# Altium PCB DE-020224.PcbDoc (part 3 of 3)
Units mil, origin at the board's own origin, x right, y up, seen from the top; angles counter-clockwise.
Board outline 7874.02 x 3937.01 mil, 2 copper layers (Top Layer, Bottom Layer); 364 components, 290 nets, 895 pads, 45 vias.
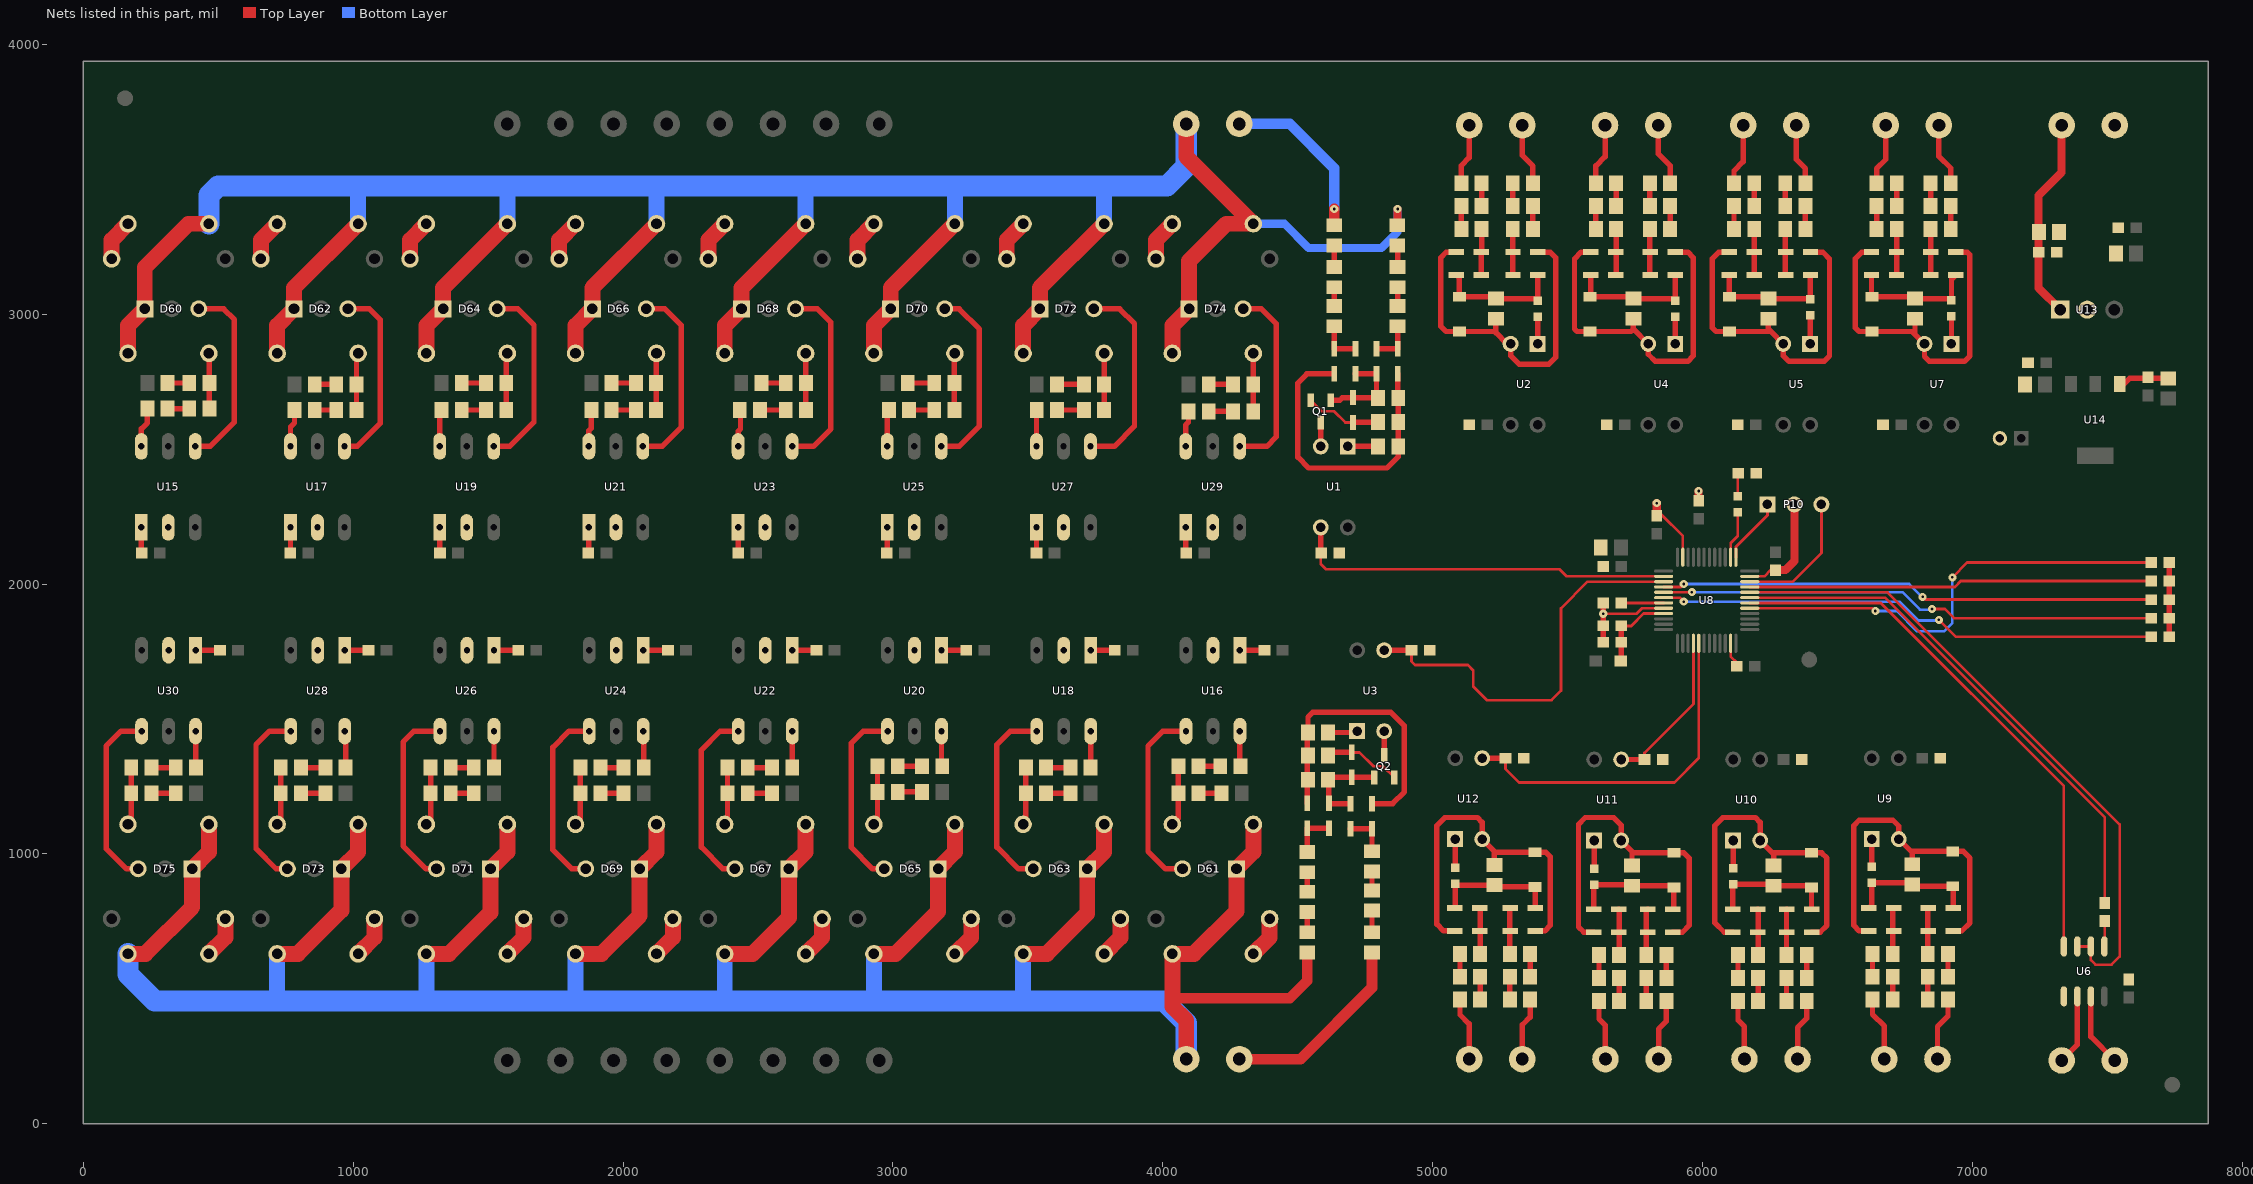
[diagram p2: the nets of this part, all layers, seen from the top]

## Via types
v1: diameter 30, hole 10, Top Layer to Bottom Layer, 45 vias

## Nets (pads, with @x,y where several pads share a name; then routed paths per layer and width w, separated by ;. In a path a pad name is that pad's centre, name@x,y a point inside that pad or via, vN(x,y) a via of type N, cw(c..) or ccw(c..) an arc to the next point about the centre after c; other vN are vias at no path point) (continued)
DIN6: R65.1 U8.16 U11.3 | length 592.1
  Top Layer w10: R65.1@5784.69,1350 5784.69,1374.69 5965.79,1555.79 U8.16@5965.79,1780.55
  Top Layer w20: U11.3@5698.15,1350 R65.1@5784.69,1350
DIN7: R79.1 U8.17 U12.3 | length 1325.4
  Top Layer w10: R79.1@5269.69,1355 5269.69,1315.31 5320,1265 5895,1265 5985.47,1355.47 U8.17@5985.47,1780.55
  Top Layer w20: U12.3@5183.15,1355 R79.1@5269.69,1355
L1: C29.2 C30.1 C32.2 C33.2 C34.2 C35.1 C37.2 C38.2 C39.2 C40.1 C42.2 C44.1 C49.1 C54.1 C57.1 C59.1 D60.1 D62.1 D64.1 D66.1 D68.1 D70.1 D72.1 D74.1 P14.1 R4.1 | length 10933.9
  Top Layer w30: R4.1@4868.46,3329.8 4870,3331.34 v1(4870,3390)
  Top Layer w59.06: C30.1@165.53,2855 165.53,2957.7 D60.1@227.83,3020 227.83,3172.83 390,3335 C29.2@465.53,3335 ; C35.1@718.31,2855 718.31,2957.7 D62.1@780.62,3020 780.62,3097.3 C32.2@1018.31,3335 ; C40.1@1271.09,2855 1271.09,2957.7 D64.1@1333.4,3020 1333.4,3097.3 C33.2@1571.09,3335 ; C44.1@1823.88,2855 1823.88,2957.7 D66.1@1886.18,3020 1886.18,3097.3 C34.2@2123.88,3335 ; C49.1@2376.66,2855 2376.66,2957.7 D68.1@2438.96,3020 2438.96,3097.3 C37.2@2676.66,3335 ; C54.1@2929.44,2855 2929.44,2957.7 D70.1@2991.74,3020 2991.74,3097.3 C38.2@3229.44,3335 ; C57.1@3482.22,2855 3482.22,2957.7 D72.1@3544.52,3020 3544.52,3097.3 C39.2@3782.22,3335 ; C59.1@4035,2855 4035,2957.7 D74.1@4097.3,3020 4097.3,3197.3 4235,3335 C42.2@4335,3335 4086.57,3583.43 P14.1@4086.57,3705
  Bottom Layer w30: C42.2@4335,3335 4450,3335 4540,3245 4810,3245 4870,3305 v1(4870,3390)
  Bottom Layer w59.06: C32.2@1018.31,3335 1018.31,3463.31 1030,3475 ; C33.2@1571.09,3335 1571.09,3471.09 1575,3475 ; 2120,3475 2123.88,3471.12 C34.2@2123.88,3335 ; 2670,3475 2676.66,3468.34 C37.2@2676.66,3335 ; C38.2@3229.44,3335 3229.44,3474.44 3230,3475 ; C39.2@3782.22,3335 3782.22,3472.22 3785,3475
  Bottom Layer w78.74: C29.2@465.53,3335 465.53,3440.53 500,3475 1030,3475 1575,3475 2120,3475 2670,3475 3230,3475 3785,3475 4015,3475 4086.57,3546.57 P14.1@4086.57,3705
L2: C31.1 C36.1 C41.1 C43.2 C45.1 C46.2 C47.2 C48.2 C50.1 C51.2 C52.2 C53.2 C55.1 C56.2 C58.1 C60.1 D61.1 D63.1 D65.1 D67.1 D69.1 D71.1 D73.1 D75.1 P15.1 R20.1 | length 11536.9
  Top Layer w39.37: 4035,465 4470,465 4535,530 R20.1@4535,635
  Top Layer w59.06: C56.2@165.53,630 230,630 403.23,803.23 D75.1@403.23,945 465.53,1007.3 C60.1@465.53,1110 ; C53.2@718.31,630 795,630 956.01,791.01 D73.1@956.01,945 1018.31,1007.3 C58.1@1018.31,1110 ; C52.2@1271.09,630 1355,630 1508.79,783.79 D71.1@1508.79,945 1571.09,1007.3 C55.1@1571.09,1110 ; C51.2@1823.88,630 1920,630 2061.57,771.57 D69.1@2061.57,945 2123.88,1007.3 C50.1@2123.88,1110 ; C48.2@2376.66,630 2480,630 2614.35,764.35 D67.1@2614.35,945 2676.66,1007.3 C45.1@2676.66,1110 ; C47.2@2929.44,630 3010,630 3167.13,787.13 D65.1@3167.13,945 3229.44,1007.3 C41.1@3229.44,1110 ; C46.2@3482.22,630 3570,630 3719.92,779.92 D63.1@3719.92,945 3782.22,1007.3 C36.1@3782.22,1110 ; P15.1@4086.57,240 4086.57,383.43 4035,435 4035,465 C43.2@4035,630 4115,630 4272.7,787.7 D61.1@4272.7,945 4335,1007.3 C31.1@4335,1110
  Bottom Layer w59.06: C53.2@718.31,630 718.31,456.69 720,455 ; 1270,455 1271.09,456.09 C52.2@1271.09,630 ; 1820,455 1823.88,458.88 C51.2@1823.88,630 ; 2370,455 2376.66,461.66 C48.2@2376.66,630 ; 2925,455 2929.44,459.44 C47.2@2929.44,630 ; 3475,455 3482.22,462.22 C46.2@3482.22,630
  Bottom Layer w78.74: C56.2@165.53,630 165.53,554.47 265,455 720,455 1270,455 1820,455 2370,455 2925,455 3475,455 4005,455 4086.57,373.43 P15.1@4086.57,240
N1: P14.2 R12.1 | length 630.1
  Top Layer w39.37: R12.1@4635,3329.8 v1(4635,3390)
  Bottom Layer w39.37: P14.2@4283.43,3705 4470,3705 4635,3540 v1(4635,3390)
N2: P15.2 R29.1 | length 731.5
  Top Layer w39.37: P15.2@4283.43,240 4510,240 4775,505 R29.1@4775,635.2
NetC1_1: C1.1 D6.2 Q1.2 | length 284.7
  Top Layer w10: Q1.2@4547.6,2681.34 4588.94,2640 4635,2640 4676.26,2598.74 D6.2@4705,2598.74
  Top Layer w20: D6.2@4705,2598.74 4706.26,2600 C1.1@4797.6,2600
NetC1_2: C1.2 D1.1 D3.1 R1.2 R9.1 | length 1137.8
  Top Layer w20: D3.1@4635,2778.74 4533.74,2778.74 4500,2745 4500,2470 4540,2430 4830,2430 4872.4,2472.4 R1.2@4872.4,2510 R9.1@4872.4,2690 4870,2692.4 D1.1@4870,2778.74
NetC2_1: C2.1 D8.2 D9.2 D11.2 U2.2 | length 1334.2
  Top Layer w20: D11.2@5087.17,3229.98 5049.98,3229.98 5030,3210 5030,2955 5049.37,2935.63 D8.2@5098.43,2935.63 5229.37,2935.63 5233.53,2931.47 ; C2.1@5233.53,2982.81 5233.53,2931.47 ; D9.2@5389.69,3229.98 5435.02,3229.98 5455,3210 5455,2840 5430,2815 5320,2815 5288.43,2846.57 U2.2@5288.43,2890 5275,2890 5233.53,2931.47
NetC2_2: C2.2 D2.1 D4.1 D5.1 D8.1 | length 477.4
  Top Layer w20: D5.1@5087.17,3145 5098.43,3133.74 D8.1@5098.43,3064.37 5226.77,3064.37 C2.2@5233.53,3057.61 5380.34,3057.61 D2.1@5388.43,3049.53 5389.69,3050.79 D4.1@5389.69,3145
NetC3_1: C3.1 D19.2 Q2.2 | length 288
  Top Layer w10: D19.2@4700,1376.26 4728.74,1376.26 4780,1325 4816.06,1325 Q2.2@4857.4,1283.66
  Top Layer w20: C3.1@4612.4,1365 4623.66,1376.26 D19.2@4700,1376.26
NetC3_2: C3.2 D13.1 D15.1 R17.2 R25.1 | length 1089.6
  Top Layer w20: D13.1@4535,1187.52 4535,1447.4 R17.2@4537.6,1450 4537.6,1507.6 4555,1525 4845,1525 4895,1475 4895,1230 4851.26,1186.26 D15.1@4775,1186.26
NetC4_1: C4.1 D17.2 D18.2 D21.2 U4.2 | length 1337.2
  Top Layer w20: D21.2@5585.59,3230 5550,3230 5525,3205 5525,2945 5534.37,2935.63 D17.2@5583.43,2935.63 5734.06,2935.63 5743.43,2945 ; C4.1@5743.43,2982.81 5743.43,2945 ; D18.2@5898.11,3229.98 5945.02,3229.98 5965,3210 5965,2845 5945,2825 5825,2825 5798.43,2851.57 U4.2@5798.43,2890 5743.43,2945
NetC4_2: C4.2 D12.1 D14.1 D16.1 D17.1 | length 498.3
  Top Layer w20: D16.1@5585.59,3145 5585.59,3066.54 D17.1@5583.43,3064.37 5736.67,3064.37 C4.2@5743.43,3057.61 5890.34,3057.61 D12.1@5898.43,3049.53 5898.43,3144.69 D14.1@5898.11,3145
NetC6_1: C6.1 D26.2 D27.2 D28.2 U5.2 | length 1341.3
  Top Layer w20: D28.2@6098.74,3230 6060,3230 6035,3205 6035,2950 6049.37,2935.63 D26.2@6100,2935.63 6252.8,2935.63 ; C6.1@6243.43,2982.81 6243.43,2945 6252.8,2935.63 ; D27.2@6399.69,3230 6445,3230 6470,3205 6470,2845 6450,2825 6320,2825 6298.43,2846.57 U5.2@6298.43,2890 6252.8,2935.63
NetC6_2: C6.2 D23.1 D24.1 D25.1 D26.1 | length 474.6
  Top Layer w20: D25.1@6098.74,3145 6098.74,3065.63 D26.1@6100,3064.37 6236.67,3064.37 C6.2@6243.43,3057.61 6395.34,3057.61 D23.1@6398.43,3054.53 6398.43,3143.74 D24.1@6399.69,3145
NetC7_1: C7.1 D32.2 D33.2 D34.2 U7.2 | length 1327.3
  Top Layer w20: D34.2@6625.59,3230 6590,3230 6565,3205 6565,2950 6579.37,2935.63 D32.2@6626.85,2935.63 6776.22,2935.63 6786.85,2925 ; C7.1@6786.85,2982.81 6786.85,2925 ; D33.2@6938.11,3230 6980,3230 6990,3220 6990,2845 6970,2825 6840,2825 6821.85,2843.15 U7.2@6821.85,2890 6786.85,2925
NetC7_2: C7.2 D29.1 D30.1 D31.1 D32.1 | length 481.3
  Top Layer w20: D31.1@6625.59,3145 6625.59,3065.63 D32.1@6626.85,3064.37 6780.09,3064.37 C7.2@6786.85,3057.61 6916.01,3057.61 D29.1@6921.85,3051.77 6921.85,3128.74 D30.1@6938.11,3145
NetC8_1: C8.1 D38.2 D39.2 D40.2 U9.2 | length 1319.3
  Top Layer w20: D39.2@6615.31,715 6580,715 6560,735 6560,1105 6580,1125 6705,1125 6726.57,1103.43 U9.2@6726.57,1055 6776.57,1005 ; C8.1@6776.57,962.19 6776.57,1005 ; D40.2@6927.83,715 6960,715 6990,745 6990,985 6965.63,1009.37 D38.2@6926.57,1009.37 6780.94,1009.37 6776.57,1005
NetC8_2: C8.2 D35.1 D36.1 D37.1 D38.1 | length 484.3
  Top Layer w20: D36.1@6615.31,800 6626.57,811.26 D35.1@6626.57,893.23 6770.73,893.23 C8.2@6776.57,887.39 6783.33,880.63 D38.1@6926.57,880.63 6927.83,879.37 D37.1@6927.83,800
NetC9_1: C9.1 D44.2 D45.2 D46.2 U10.2 | length 1332.5
  Top Layer w20: D45.2@6111.89,710 6080,710 6045,745 6045,1105 6075,1135 6195,1135 6213.15,1116.85 U10.2@6213.15,1050 6263.15,1000 ; C9.1@6263.15,957.19 6263.15,1000 ; D46.2@6404.41,710 6435,710 6460,735 6460,985 6440.63,1004.37 D44.2@6403.15,1004.37 6267.52,1004.37 6263.15,1000
NetC9_2: C9.2 D41.1 D42.1 D43.1 D44.1 | length 470.1
  Top Layer w20: D42.1@6111.89,795 6111.89,886.97 D41.1@6113.15,888.23 6257.31,888.23 C9.2@6263.15,882.39 6396.39,882.39 D44.1@6403.15,875.63 6403.15,796.26 D43.1@6404.41,795
NetC11_1: C11.1 D51.2 D52.2 D53.2 U11.2 | length 1334.7
  Top Layer w20: D52.2@5596.89,710 5560,710 5540,730 5540,1110 5565,1135 5670,1135 5698.15,1106.85 U11.2@5698.15,1050 5738.15,1010 ; C11.1@5738.15,957.19 5738.15,1010 ; D53.2@5889.41,710 5925,710 5950,735 5950,985 5930.63,1004.37 D51.2@5893.15,1004.37 5743.78,1004.37 5738.15,1010
NetC11_2: C11.2 D47.1 D49.1 D50.1 D51.1 | length 472.2
  Top Layer w20: D49.1@5596.89,795 5596.89,884.21 D47.1@5598.15,885.47 5735.06,885.47 C11.2@5738.15,882.39 5886.39,882.39 D51.1@5893.15,875.63 5893.15,798.74 D50.1@5889.41,795
NetC19_1: C19.1 D57.2 D58.2 D59.2 U12.2 | length 1340.4
  Top Layer w20: D58.2@5081.89,715 5040,715 5015,740 5015,1105 5045,1135 5165,1135 5183.15,1116.85 U12.2@5183.15,1055 5228.15,1010 ; C19.1@5228.15,959.43 5228.15,1010 ; D59.2@5379.41,715 5415,715 5435,735 5435,990 5418.39,1006.61 D57.2@5378.15,1006.61 5231.54,1006.61 5228.15,1010
NetC19_2: C19.2 D54.1 D55.1 D56.1 D57.1 | length 469.6
  Top Layer w20: D55.1@5081.89,800 5083.15,801.26 D54.1@5083.15,890.47 5088.99,884.63 C19.2@5228.15,884.63 5234.91,877.87 D57.1@5378.15,877.87 5379.41,876.61 D56.1@5379.41,800
NetC24_2: C24.2 C27.2 P11.2 U13.1 | length 751.7
  Top Layer w30: U13.1@7325,3016.65 7244.96,3096.69 C27.2@7244.96,3230 7244.96,3439.96 7330,3525 P11.2@7330,3700
NetC29_1: C29.1 R83.2 | length 155.1
  Top Layer w59.06: R83.2@104.9,3205 104.9,3274.37 C29.1@165.53,3335
NetC30_2: C30.2 R85.2 R86.1 | length 205.8
  Top Layer w20: C30.2@465.53,2855 467.4,2853.13 R86.1@467.4,2745 R85.2@467.4,2650
NetC31_2: C31.2 R89.2 R90.1 | length 224.4
  Top Layer w20: C31.2@4035,1110 4057.6,1132.6 R89.2@4057.6,1325
NetC32_1: C32.1 R94.2 | length 155.1
  Top Layer w59.06: R94.2@657.68,3205 657.68,3274.37 C32.1@718.31,3335
NetC33_1: C33.1 R95.2 | length 155.1
  Top Layer w59.06: R95.2@1210.46,3205 1210.46,3274.37 C33.1@1271.09,3335
NetC34_1: C34.1 R106.2 | length 155.1
  Top Layer w59.06: R106.2@1763.25,3205 1763.25,3274.37 C34.1@1823.88,3335
NetC35_2: C35.2 R97.2 R98.1 | length 212.4
  Top Layer w20: R97.2@1012.4,2645 R98.1@1012.4,2740 1012.4,2849.09 C35.2@1018.31,2855
NetC36_2: C36.2 R101.2 R102.1 | length 214.3
  Top Layer w20: C36.2@3482.22,1110 3492.6,1120.38 R101.2@3492.6,1320
NetC37_1: C37.1 R107.2 | length 155.1
  Top Layer w59.06: R107.2@2316.03,3205 2316.03,3274.37 C37.1@2376.66,3335
NetC38_1: C38.1 R108.2 | length 155.1
  Top Layer w59.06: R108.2@2868.81,3205 2868.81,3274.37 C38.1@2929.44,3335
NetC39_1: C39.1 R119.2 | length 155.1
  Top Layer w59.06: R119.2@3421.59,3205 3421.59,3274.37 C39.1@3482.22,3335
NetC40_2: C40.2 R110.2 R111.1 | length 211.5
  Top Layer w20: R110.2@1567.4,2645 1567.4,2851.31 C40.2@1571.09,2855
NetC41_2: C41.2 R114.2 R115.1 | length 220.5
  Top Layer w20: C41.2@2929.44,1110 2942.6,1123.16 R114.2@2942.6,1325
NetC42_1: C42.1 R120.2 | length 155.1
  Top Layer w59.06: R120.2@3974.37,3205 3974.37,3274.37 C42.1@4035,3335
NetC43_1: C43.1 R131.2 | length 155.1
  Top Layer w59.06: C43.1@4335,630 4395.63,690.63 R131.2@4395.63,760
NetC44_2: C44.2 R122.2 R123.1 | length 210.6
  Top Layer w20: R122.2@2122.4,2645 2122.4,2853.53 C44.2@2123.88,2855
NetC45_2: C45.2 R126.2 R127.1 | length 214.3
  Top Layer w20: C45.2@2376.66,1110 2386.97,1120.31 R126.2@2386.97,1320
NetC46_1: C46.1 R132.2 | length 155.1
  Top Layer w59.06: C46.1@3782.22,630 3842.85,690.63 R132.2@3842.85,760
NetC47_1: C47.1 R133.2 | length 155.1
  Top Layer w59.06: C47.1@3229.44,630 3290.07,690.63 R133.2@3290.07,760
NetC48_1: C48.1 R144.2 | length 155.1
  Top Layer w59.06: C48.1@2676.66,630 2737.29,690.63 R144.2@2737.29,760
NetC49_2: C49.2 R135.2 R136.1 | length 210.3
  Top Layer w20: C49.2@2676.66,2855 2677.4,2854.25 R135.2@2677.4,2645
NetC50_2: C50.2 R139.2 R140.1 | length 217.5
  Top Layer w20: C50.2@1823.88,1110 1841.97,1128.09 R139.2@1841.97,1320
NetC51_1: C51.1 R145.2 | length 155.1
  Top Layer w59.06: C51.1@2123.88,630 2184.5,690.63 R145.2@2184.5,760
NetC52_1: C52.1 R146.2 | length 155.1
  Top Layer w59.06: C52.1@1571.09,630 1631.72,690.63 R146.2@1631.72,760
NetC53_1: C53.1 R157.2 | length 155.1
  Top Layer w59.06: C53.1@1018.31,630 1078.94,690.63 R157.2@1078.94,760
NetC54_2: C54.2 R148.2 R149.1 | length 210.8
  Top Layer w20: R148.2@3227.4,2645 3227.4,2852.96 C54.2@3229.44,2855
NetC55_2: C55.2 R152.2 R153.1 | length 216.6
  Top Layer w20: C55.2@1271.09,1110 1286.97,1125.87 R152.2@1286.97,1320
NetC56_1: C56.1 R158.2 | length 155.1
  Top Layer w59.06: C56.1@465.53,630 526.16,690.63 R158.2@526.16,760
NetC57_2: C57.2 R160.2 R161.1 | length 210.1
  Top Layer w20: C57.2@3782.22,2855 3782.4,2854.82 R160.2@3782.4,2645
NetC58_2: C58.2 R164.2 R165.1 | length 215.7
  Top Layer w20: C58.2@718.31,1110 731.97,1123.66 R164.2@731.97,1320
NetC59_2: C59.2 R170.2 R171.1 | length 215.1
  Top Layer w20: R170.2@4334.7,2640 4335,2640.3 C59.2@4335,2855
NetC60_2: C60.2 R174.2 R175.1 | length 215
  Top Layer w20: C60.2@165.53,1110 177.6,1122.07 R174.2@177.6,1320
NetD1_2: D1.2 D7.1 R2.2 | length 162.1
  Top Layer w20: D7.1@4791.67,2871.26 D1.2@4870,2871.26 R2.2@4870,2955
NetD2_2: D2.2 U2.1 | length 100.5
  Top Layer w20: U2.1@5388.43,2890 D2.2@5388.43,2990.47
NetD3_2: D3.2 D10.1 R10.2 | length 162.1
  Top Layer w20: R10.2@4635,2955 D3.2@4635,2871.26 D10.1@4713.33,2871.26
NetD4_2: D4.2 D9.1 R5.2 | length 170.5
  Top Layer w20: R5.2@5296.02,3315.03 5296.02,3146.14 D4.2@5297.17,3145
NetD5_2: D5.2 D11.1 R14.2 | length 170.5
  Top Layer w20: D5.2@5179.69,3145 D11.1@5179.69,3229.98 5180.83,3231.13 R14.2@5180.83,3315.03
NetD6_1: D6.1 D7.2 D10.2 Q1.1 R9.2 | length 348.3
  Top Layer w20: Q1.1@4622.4,2681.34 4656.34,2681.34 4665,2690 R9.2@4797.6,2690 4791.67,2695.93 D7.2@4791.67,2778.74 D10.2@4713.33,2778.74
NetD12_2: D12.2 U4.1 | length 100.5
  Top Layer w20: U4.1@5898.43,2890 D12.2@5898.43,2990.47
NetD13_2: D13.2 D20.1 R18.2 | length 167.6
  Top Layer w20: R18.2@4535,1007.4 D13.2@4535,1095 D20.1@4615,1095
NetD14_2: D14.2 D18.1 R21.2 | length 170.5
  Top Layer w20: R21.2@5804.45,3315.03 5804.45,3146.14 D14.2@5805.59,3145
NetD15_2: D15.2 D22.1 R27.2 | length 163.7
  Top Layer w20: D22.1@4695,1093.74 D15.2@4775,1093.74 R27.2@4775,1010
NetD16_2: D16.2 D21.1 R30.2 | length 170.5
  Top Layer w20: D16.2@5678.11,3145 5679.25,3146.14 R30.2@5679.25,3315
NetD19_1: D19.1 D20.2 D22.2 Q2.1 R25.2 | length 342.9
  Top Layer w20: D22.2@4695,1186.26 4616.26,1186.26 D20.2@4615,1187.52 4615,1272.4 R25.2@4612.4,1275 4621.14,1283.74 D19.1@4700,1283.74 4782.52,1283.74 Q2.1@4782.6,1283.66
NetD23_2: D23.2 U5.1 | length 105.5
  Top Layer w20: U5.1@6398.43,2890 D23.2@6398.43,2995.47
NetD24_2: D24.2 D27.1 R33.2 | length 170.5
  Top Layer w20: R33.2@6306.02,3315.03 6306.02,3146.14 D24.2@6307.17,3145
NetD25_2: D25.2 D28.1 R37.2 | length 170.2
  Top Layer w20: R37.2@6190.83,3315.03 6190.83,3145.43 D25.2@6191.26,3145
NetD29_2: D29.2 U7.1 | length 102.7
  Top Layer w20: U7.1@6921.85,2890 D29.2@6921.85,2992.72
NetD30_2: D30.2 D33.1 R41.2 | length 170.5
  Top Layer w20: R41.2@6844.45,3315.03 6844.45,3146.14 D30.2@6845.59,3145
NetD31_2: D31.2 D34.1 R45.2 | length 170.5
  Top Layer w20: D31.2@6718.11,3145 6719.25,3146.14 R45.2@6719.25,3315.03
NetD35_2: D35.2 U9.1 | length 102.7
  Top Layer w20: D35.2@6626.57,952.28 U9.1@6626.57,1055
NetD36_2: D36.2 D39.1 R48.2 | length 171.6
  Top Layer w20: R48.2@6703.98,629.97 6703.98,796.14 D36.2@6707.83,800
NetD37_2: D37.2 D40.1 R52.2 | length 170.5
  Top Layer w20: R52.2@6834.17,629.97 6834.17,798.86 D37.2@6835.31,800
NetD41_2: D41.2 U10.1 | length 102.7
  Top Layer w20: D41.2@6113.15,947.28 U10.1@6113.15,1050
NetD42_2: D42.2 D45.1 R55.2 | length 170.5
  Top Layer w20: D42.2@6204.41,795 6205.55,793.86 R55.2@6205.55,624.97
NetD43_2: D43.2 D46.1 R59.2 | length 170.5
  Top Layer w20: R59.2@6310.75,624.97 6310.75,793.86 D43.2@6311.89,795
NetD47_2: D47.2 U11.1 | length 105.5
  Top Layer w20: D47.2@5598.15,944.53 U11.1@5598.15,1050
NetD48_2: D48.2 R66.1 | length 86.1
  Top Layer w10: D48.2@6130,2324.53 6130,2408.46 R66.1@6131.54,2410
NetD49_2: D49.2 D52.1 R62.2 | length 170.5
  Top Layer w20: D49.2@5689.41,795 5690.55,793.86 R62.2@5690.55,624.97
NetD50_2: D50.2 D53.1 R67.2 | length 172.6
  Top Layer w20: R67.2@5790.75,624.97 5790.75,788.86 D50.2@5796.89,795
NetD54_2: D54.2 U12.1 | length 105.5
  Top Layer w20: D54.2@5083.15,949.53 U12.1@5083.15,1055
NetD55_2: D55.2 D58.1 R76.2 | length 170.5
  Top Layer w20: D55.2@5174.41,800 5175.55,798.86 R76.2@5175.55,630
NetD56_2: D56.2 D59.1 R80.2 | length 170.5
  Top Layer w20: R80.2@5285.75,630 5285.75,798.86 D56.2@5286.89,800
NetD60_3: D60.3 U15.4 | length 711
  Top Layer w20: U15.4@415,2510 470,2510 560,2600 560,2980 520,3020 D60.3@427.83,3020
NetD61_3: D61.3 U16.4 | length 707.9
  Top Layer w20: D61.3@4072.7,945 4010,945 3945,1010 3945,1400 4000,1455 U16.4@4085.53,1455
NetD62_3: D62.3 U17.4 | length 688.4
  Top Layer w20: U17.4@967.78,2510 1015,2510 1100,2595 1100,2980 1060,3020 D62.3@980.62,3020
NetD63_3: D63.3 U18.4 | length 716.5
  Top Layer w20: D63.3@3519.92,945 3465,945 3385,1025 3385,1405 3435,1455 U18.4@3532.75,1455
NetD64_3: D64.3 U19.4 | length 708.2
  Top Layer w20: U19.4@1520.56,2510 1580,2510 1670,2600 1670,2960 1610,3020 D64.3@1533.4,3020
NetD65_3: D65.3 U20.4 | length 693.9
  Top Layer w20: D65.3@2967.13,945 2925,945 2845,1025 2845,1410 2890,1455 U20.4@2979.97,1455
NetD66_3: D66.3 U21.4 | length 704.3
  Top Layer w20: U21.4@2073.34,2510 2145,2510 2215,2580 2215,2960 2155,3020 D66.3@2086.18,3020
NetD67_3: D67.3 U22.4 | length 683.7
  Top Layer w20: D67.3@2414.35,945 2370,945 2290,1025 2290,1385 2360,1455 U22.4@2427.19,1455
NetD68_3: D68.3 U23.4 | length 717.6
  Top Layer w20: U23.4@2626.12,2510 2705,2510 2770,2575 2770,2970 2720,3020 D68.3@2638.96,3020
NetD69_3: D69.3 U24.4 | length 689.8
  Top Layer w20: D69.3@1861.57,945 1810,945 1740,1015 1740,1395 1800,1455 U24.4@1874.41,1455
NetD70_3: D70.3 U25.4 | length 691.5
  Top Layer w20: U25.4@3178.91,2510 3245,2510 3320,2585 3320,2945 3245,3020 D70.3@3191.74,3020
NetD71_3: D71.3 U26.4 | length 697.2
  Top Layer w20: D71.3@1308.79,945 1270,945 1185,1030 1185,1415 1225,1455 U26.4@1321.63,1455
NetD72_3: D72.3 U27.4 | length 747.6
  Top Layer w20: U27.4@3731.69,2510 3820,2510 3895,2585 3895,2965 3840,3020 D72.3@3744.52,3020
NetD73_3: D73.3 U28.4 | length 681.6
  Top Layer w20: D73.3@756.01,945 715,945 640,1020 640,1405 690,1455 U28.4@768.84,1455
NetD74_3: D74.3 U29.4 | length 715.5
  Top Layer w20: U29.4@4284.47,2510 4385,2510 4420,2545 4420,2965 4365,3020 D74.3@4297.3,3020
NetD75_3: D75.3 U30.4 | length 683.1
  Top Layer w20: D75.3@203.23,945 160,945 85,1020 85,1400 140,1455 U30.4@216.06,1455
NetP1_1: P1.1 R7.1 | length 231.1
  Top Layer w20: P1.1@5331.85,3700 5331.85,3588.15 5370.83,3549.17 R7.1@5370.83,3485
NetP1_2: P1.2 R16.1 | length 227
  Top Layer w20: R16.1@5106.02,3485 5106.02,3551.02 5135,3580 P1.2@5135,3700
NetP2_1: P2.1 R23.1 | length 233.2
  Top Layer w20: P2.1@5835.28,3700 5835.28,3594.72 5879.25,3550.75 R23.1@5879.25,3485
NetP2_2: P2.2 R32.1 | length 229.1
  Top Layer w20: R32.1@5604.45,3485 5604.45,3549.45 5638.43,3583.43 P2.2@5638.43,3700
NetP3_1: P3.1 R35.1 | length 229.1
  Top Layer w20: P3.1@6346.85,3700 6346.85,3573.15 6380.83,3539.17 R35.1@6380.83,3485
NetP3_2: P3.2 R39.1 | length 229.1
  Top Layer w20: R39.1@6116.02,3485 6116.02,3531.02 6150,3565 P3.2@6150,3700
NetP4_1: P4.1 U6.7 | length 274.1
  Top Layer w20: U6.7@7438.43,472.48 7438.43,323.43 P4.1@7526.85,235
NetP4_2: P4.2 U6.6 | length 261.7
  Top Layer w20: P4.2@7330,235 7388.43,293.43 U6.6@7388.43,472.48
NetP5_1: P5.1 R43.1 | length 233.2
  Top Layer w20: P5.1@6875.28,3700 6875.28,3584.72 6919.25,3540.75 R43.1@6919.25,3485
NetP5_2: P5.2 R47.1 | length 229.1
  Top Layer w20: R47.1@6644.45,3485 6644.45,3539.45 6678.43,3573.43 P5.2@6678.43,3700
NetP6_1: P6.1 R50.1 | length 238.2
  Top Layer w20: R50.1@6629.17,460 6629.17,405.83 6673.15,361.85 P6.1@6673.15,240
NetP6_2: P6.2 R54.1 | length 236.1
  Top Layer w20: P6.2@6870,240 6870,360 6908.98,398.98 R54.1@6908.98,460
NetP7_1: P7.1 R57.1 | length 224.9
  Top Layer w20: R57.1@6130.75,455 6130.75,384.25 6154.72,360.28 P7.1@6154.72,240
NetP7_2: P7.2 R61.1 | length 229.1
  Top Layer w20: P7.2@6351.57,240 6351.57,356.57 6385.55,390.55 R61.1@6385.55,455
NetP8_1: P8.1 R64.1 | length 224.9
  Top Layer w20: R64.1@5615.75,455 5615.75,389.25 5639.72,365.28 P8.1@5639.72,240
NetP8_2: P8.2 R69.1 | length 227
  Top Layer w20: P8.2@5836.57,240 5836.57,351.57 5865.55,380.55 R69.1@5865.55,455
NetP9_1: P9.1 R78.1 | length 234.1
  Top Layer w20: R78.1@5100.75,460 5100.75,404.25 5134.72,370.28 P9.1@5134.72,240
NetP9_2: P9.2 R82.1 | length 232
  Top Layer w20: P9.2@5331.57,240 5331.57,366.57 5360.55,395.55 R82.1@5360.55,460
NetQ1_3: Q1.3 U1.2 | length 88.7
  Top Layer w20: U1.2@4585,2510 Q1.3@4585,2598.66
NetQ2_3: Q2.3 U3.2 | length 88.7
  Top Layer w20: Q2.3@4820,1366.34 U3.2@4820,1455
NetR1_1: R1.1 U1.1 | length 112.6
  Top Layer w20: U1.1@4685,2510 R1.1@4797.6,2510
NetR2_1: R2.1 R3.2 | length 70.2
  Top Layer w20: R2.1@4870,3029.8 R3.2@4870,3100
NetR3_1: R3.1 R4.2 | length 80.8
  Top Layer w20: R4.2@4868.46,3255 4870,3253.46 R3.1@4870,3174.8
NetR5_1: R5.1 R6.2 | length 85
  Top Layer w20: R5.1@5370.83,3315.03 R6.2@5370.83,3400.02
NetR6_1: R6.1 R7.2 | length 85
  Top Layer w20: R6.1@5296.02,3400.02 R7.2@5296.02,3485
NetR10_1: R10.1 R11.2 | length 70.2
  Top Layer w20: R10.1@4635,3029.8 R11.2@4635,3100
NetR11_1: R11.1 R12.2 | length 80.2
  Top Layer w20: R11.1@4635,3174.8 R12.2@4635,3255
NetR14_1: R14.1 R15.2 | length 85
  Top Layer w20: R14.1@5106.02,3315.03 R15.2@5106.02,3400.02
NetR15_1: R15.1 R16.2 | length 85
  Top Layer w20: R15.1@5180.83,3400.02 R16.2@5180.83,3485
NetR17_1: R17.1 U3.1 | length 109.7
  Top Layer w20: R17.1@4612.4,1450 4715,1450 U3.1@4720,1455
NetR18_1: R18.1 R19.2 | length 72.8
  Top Layer w20: R19.2@4535,859.8 R18.1@4535,932.6
NetR19_1: R19.1 R20.2 | length 75.2
  Top Layer w20: R20.2@4535,709.8 R19.1@4535,785
NetR21_1: R21.1 R22.2 | length 85
  Top Layer w20: R21.1@5879.25,3315.03 R22.2@5879.25,3400.02
NetR22_1: R22.1 R23.2 | length 85
  Top Layer w20: R22.1@5804.45,3400.02 R23.2@5804.45,3485
NetR27_1: R27.1 R28.2 | length 70.2
  Top Layer w20: R28.2@4775,865 R27.1@4775,935.2
NetR28_1: R28.1 R29.2 | length 80.2
  Top Layer w20: R29.2@4775,710 R28.1@4775,790.2
NetR30_1: R30.1 R31.2 | length 85
  Top Layer w20: R30.1@5604.45,3315 R31.2@5604.45,3400
NetR31_1: R31.1 R32.2 | length 85
  Top Layer w20: R31.1@5679.25,3400 R32.2@5679.25,3485
NetR33_1: R33.1 R34.2 | length 85
  Top Layer w20: R33.1@6380.83,3315.03 R34.2@6380.83,3400.02
NetR34_1: R34.1 R35.2 | length 85
  Top Layer w20: R34.1@6306.02,3400.02 R35.2@6306.02,3485
NetR37_1: R37.1 R38.2 | length 85
  Top Layer w20: R37.1@6116.02,3315.03 R38.2@6116.02,3400.02
NetR38_1: R38.1 R39.2 | length 85
  Top Layer w20: R38.1@6190.83,3400.02 R39.2@6190.83,3485
NetR40_1: R40.1 U6.1 | length 94.7
  Top Layer w10: U6.1@7488.43,657.52 7490,659.09 R40.1@7490,751.54
NetR41_1: R41.1 R42.2 | length 85
  Top Layer w20: R41.1@6919.25,3315.03 R42.2@6919.25,3400.02
NetR42_1: R42.1 R43.2 | length 85
  Top Layer w20: R42.1@6844.45,3400.02 R43.2@6844.45,3485
NetR45_1: R45.1 R46.2 | length 85
  Top Layer w20: R45.1@6644.45,3315.03 R46.2@6644.45,3400.02
NetR46_1: R46.1 R47.2 | length 85
  Top Layer w20: R46.1@6719.25,3400.02 R47.2@6719.25,3485
NetR48_1: R48.1 R49.2 | length 85
  Top Layer w20: R49.2@6629.17,544.98 R48.1@6629.17,629.97
NetR49_1: R49.1 R50.2 | length 85
  Top Layer w20: R50.2@6703.98,460 R49.1@6703.98,544.98
NetR52_1: R52.1 R53.2 | length 85
  Top Layer w20: R53.2@6908.98,544.98 R52.1@6908.98,629.97
NetR53_1: R53.1 R54.2 | length 85
  Top Layer w20: R54.2@6834.17,460 R53.1@6834.17,544.98
NetR55_1: R55.1 R56.2 | length 85
  Top Layer w20: R56.2@6130.75,539.98 R55.1@6130.75,624.97
NetR56_1: R56.1 R57.2 | length 85
  Top Layer w20: R57.2@6205.55,455 R56.1@6205.55,539.98
NetR59_1: R59.1 R60.2 | length 85
  Top Layer w20: R60.2@6385.55,539.98 R59.1@6385.55,624.97
NetR60_1: R60.1 R61.2 | length 85
  Top Layer w20: R61.2@6310.75,455 R60.1@6310.75,539.98
NetR62_1: R62.1 R63.2 | length 85
  Top Layer w20: R63.2@5615.75,539.98 R62.1@5615.75,624.97
NetR63_1: R63.1 R64.2 | length 85
  Top Layer w20: R64.2@5690.55,455 R63.1@5690.55,539.98
NetR67_1: R67.1 R68.2 | length 85
  Top Layer w20: R68.2@5865.55,539.98 R67.1@5865.55,624.97
NetR68_1: R68.1 R69.2 | length 85
  Top Layer w20: R69.2@5790.75,455 R68.1@5790.75,539.98
NetR76_1: R76.1 R77.2 | length 85
  Top Layer w20: R77.2@5100.75,545 R76.1@5100.75,630
NetR77_1: R77.1 R78.2 | length 85
  Top Layer w20: R78.2@5175.55,460 R77.1@5175.55,545
NetR80_1: R80.1 R81.2 | length 85
  Top Layer w20: R81.2@5360.55,545 R80.1@5360.55,630
NetR81_1: R81.1 R82.2 | length 85
  Top Layer w20: R82.2@5285.75,460 R81.1@5285.75,545
NetR84_1: R84.1 U15.6 | length 149.4
  Top Layer w20: U15.6@215,2510 215,2575 237.6,2597.6 R84.1@237.6,2650
NetR84_2: R84.2 R85.1 | length 80.2
  Top Layer w20: R84.2@312.4,2650 R85.1@392.6,2650
NetR86_2: R86.2 R87.1 | length 80.2
  Top Layer w20: R87.1@312.4,2745 R86.2@392.6,2745
NetR88_1: R88.1 U16.6 | length 130.8
  Top Layer w20: U16.6@4285.53,1455 4285.53,1326.87 R88.1@4287.4,1325
NetR88_2: R88.2 R89.1 | length 80.2
  Top Layer w20: R89.1@4132.4,1325 R88.2@4212.6,1325
NetR90_2: R90.2 R91.1 | length 85.2
  Top Layer w20: R90.2@4132.4,1225 R91.1@4217.6,1225
NetR92_2: R92.2 U15.1 | length 95.6
  Top Layer w20: U15.1@215,2210 215,2116.54 R92.2@216.54,2115
NetR93_2: R93.2 U16.1 | length 91
  Top Layer w20: U16.1@4285.53,1755 R93.2@4376.54,1755
NetR96_1: R96.1 U17.6 | length 141.1
  Top Layer w20: U17.6@767.78,2510 767.78,2582.78 782.6,2597.6 R96.1@782.6,2645
NetR96_2: R96.2 R97.1 | length 80.2
  Top Layer w20: R96.2@857.4,2645 R97.1@937.6,2645
NetR98_2: R98.2 R99.1 | length 80.2
  Top Layer w20: R99.1@857.4,2740 R98.2@937.6,2740
NetR100_1: R100.1 U18.6 | length 135.1
  Top Layer w20: R100.1@3732.4,1320 3732.4,1454.65 U18.6@3732.75,1455
NetR100_2: R100.2 R101.1 | length 90.2
  Top Layer w20: R101.1@3567.4,1320 R100.2@3657.6,1320
NetR102_2: R102.2 R103.1 | length 90.2
  Top Layer w20: R102.2@3567.4,1225 R103.1@3657.6,1225
NetR104_2: R104.2 U17.1 | length 95.5
  Top Layer w20: R104.2@766.54,2115 767.78,2116.25 U17.1@767.78,2210
NetR105_2: R105.2 U18.1 | length 88.8
  Top Layer w20: U18.1@3732.75,1755 R105.2@3821.54,1755
NetR109_1: R109.1 U19.6 | length 137.9
  Top Layer w20: U19.6@1320.56,2510 1320.56,2637.96 R109.1@1327.6,2645
NetR109_2: R109.2 R110.1 | length 90.2
  Top Layer w20: R109.2@1402.4,2645 R110.1@1492.6,2645
NetR111_2: R111.2 R112.1 | length 90.2
  Top Layer w20: R112.1@1402.4,2745 R111.2@1492.6,2745
NetR113_1: R113.1 U20.6 | length 131
  Top Layer w20: U20.6@3179.97,1455 3179.97,1327.43 R113.1@3182.4,1325
NetR113_2: R113.2 R114.1 | length 90.2
  Top Layer w20: R114.1@3017.4,1325 R113.2@3107.6,1325
NetR115_2: R115.2 R116.1 | length 90.2
  Top Layer w20: R115.2@3017.4,1230 R116.1@3107.6,1230
NetR117_2: R117.2 U19.1 | length 95.4
  Top Layer w20: U19.1@1320.56,2210 1320.56,2115.97 R117.2@1321.54,2115
NetR118_2: R118.2 U20.1 | length 91.6
  Top Layer w20: U20.1@3179.97,1755 R118.2@3271.54,1755
NetR121_1: R121.1 U21.6 | length 138.8
  Top Layer w20: U21.6@1873.34,2510 1873.34,2568.34 1882.6,2577.6 R121.1@1882.6,2645
NetR121_2: R121.2 R122.1 | length 90.2
  Top Layer w20: R121.2@1957.4,2645 R122.1@2047.6,2645
NetR123_2: R123.2 R124.1 | length 90.2
  Top Layer w20: R124.1@1957.4,2745 R123.2@2047.6,2745
NetR125_1: R125.1 U22.6 | length 135.2
  Top Layer w20: R125.1@2626.77,1320 2626.77,1454.58 U22.6@2627.19,1455
NetR125_2: R125.2 R126.1 | length 90.2
  Top Layer w20: R126.1@2461.77,1320 R125.2@2551.97,1320
NetR127_2: R127.2 R128.1 | length 90.2
  Top Layer w20: R127.2@2461.77,1225 R128.1@2551.97,1225
NetR129_2: R129.2 U21.1 | length 95.7
  Top Layer w20: R129.2@1871.54,2115 1873.34,2116.81 U21.1@1873.34,2210
NetR130_2: R130.2 U22.1 | length 89.3
  Top Layer w20: U22.1@2627.19,1755 R130.2@2716.54,1755
NetR134_1: R134.1 U23.6 | length 139.7
  Top Layer w20: U23.6@2426.12,2510 2426.12,2566.12 2435,2575 2435,2642.6 R134.1@2432.6,2645
NetR134_2: R134.2 R135.1 | length 95.2
  Top Layer w20: R134.2@2507.4,2645 R135.1@2602.6,2645
NetR136_2: R136.2 R137.1 | length 90.2
  Top Layer w20: R137.1@2512.4,2745 R136.2@2602.6,2745
NetR138_1: R138.1 U24.6 | length 136
  Top Layer w20: U24.6@2074.41,1455 2076.77,1452.63 R138.1@2076.77,1320
NetR138_2: R138.2 R139.1 | length 85.2
  Top Layer w20: R139.1@1916.77,1320 R138.2@2001.97,1320
NetR140_2: R140.2 R141.1 | length 85.2
  Top Layer w20: R140.2@1916.77,1225 R141.1@2001.97,1225
NetR142_2: R142.2 U23.1 | length 95.2
  Top Layer w20: U23.1@2426.12,2210 2426.12,2115.41 R142.2@2426.54,2115
NetR143_2: R143.2 U24.1 | length 92.1
  Top Layer w20: U24.1@2074.41,1755 R143.2@2166.54,1755
NetR147_1: R147.1 U25.6 | length 137.5
  Top Layer w20: U25.6@2978.91,2510 2978.91,2639 R147.1@2984.9,2645
NetR147_2: R147.2 R148.1 | length 92.9
  Top Layer w20: R147.2@3059.7,2645 R148.1@3152.6,2645
NetR149_2: R149.2 R150.1 | length 97.9
  Top Layer w20: R150.1@3054.7,2745 R149.2@3152.6,2745
NetR151_1: R151.1 U26.6 | length 135.1
  Top Layer w20: U26.6@1521.63,1455 1521.77,1454.85 R151.1@1521.77,1320
NetR151_2: R151.2 R152.1 | length 85.2
  Top Layer w20: R152.1@1361.77,1320 R151.2@1446.97,1320
NetR153_2: R153.2 R154.1 | length 85.2
  Top Layer w20: R153.2@1361.77,1225 R154.1@1446.97,1225
NetR155_2: R155.2 U25.1 | length 96
  Top Layer w20: R155.2@2976.54,2115 2978.91,2117.37 U25.1@2978.91,2210
NetR156_2: R156.2 U26.1 | length 89.9
  Top Layer w20: U26.1@1521.63,1755 R156.2@1611.54,1755
NetR159_1: R159.1 U27.6 | length 135.4
  Top Layer w20: U27.6@3531.69,2510 3531.69,2644.09 R159.1@3532.6,2645
NetR159_2: R159.2 R160.1 | length 100.2
  Top Layer w20: R159.2@3607.4,2645 R160.1@3707.6,2645
NetR161_2: R161.2 R162.1 | length 100.2
  Top Layer w20: R162.1@3607.4,2740 R161.2@3707.6,2740
NetR163_1: R163.1 U28.6 | length 136.2
  Top Layer w20: U28.6@968.84,1455 971.77,1452.07 R163.1@971.77,1320
NetR163_2: R163.2 R164.1 | length 90.2
  Top Layer w20: R164.1@806.77,1320 R163.2@896.97,1320
NetR165_2: R165.2 R166.1 | length 90.2
  Top Layer w20: R165.2@806.77,1225 R166.1@896.97,1225
NetR167_2: R167.2 U27.1 | length 95.1
  Top Layer w20: R167.2@3531.54,2115 3531.69,2115.15 U27.1@3531.69,2210
NetR168_2: R168.2 U28.1 | length 87.7
  Top Layer w20: U28.1@968.84,1755 R168.2@1056.54,1755
NetR169_1: R169.1 U29.6 | length 134.3
  Top Layer w20: U29.6@4084.47,2510 4084.47,2589.47 4094.9,2599.9 R169.1@4094.9,2640
NetR169_2: R169.2 R170.1 | length 90.2
  Top Layer w20: R169.2@4169.7,2640 R170.1@4259.9,2640
NetR171_2: R171.2 R172.1 | length 90.2
  Top Layer w20: R172.1@4169.7,2740 R171.2@4259.9,2740
NetR173_1: R173.1 U30.6 | length 135.6
  Top Layer w20: U30.6@416.06,1455 417.4,1453.66 R173.1@417.4,1320
NetR173_2: R173.2 R174.1 | length 90.2
  Top Layer w20: R174.1@252.4,1320 R173.2@342.6,1320
NetR175_2: R175.2 R176.1 | length 90.2
  Top Layer w20: R175.2@252.4,1225 R176.1@342.6,1225
NetR177_2: R177.2 U29.1 | length 95.9
  Top Layer w20: U29.1@4084.47,2210 4084.47,2117.07 R177.2@4086.54,2115
NetR178_2: R178.2 U30.1 | length 90.5
  Top Layer w20: U30.1@416.06,1755 R178.2@506.54,1755
NRST: C10.2 U8.7 | length 157.2
  Top Layer w10: C10.2@5698.46,1930 5698.62,1930.16 U8.7@5855.55,1930.16
RS485_DE: U6.2 U6.3 U8.32 | length 2443.4
  Top Layer w10: U8.32@6174.45,1969.53 6685.47,1969.53 7545,1110 7545,620 7515,590 7455,590 7438.43,606.57 U6.2@7438.43,657.52 U6.3@7388.43,657.52
SELECT0: R70.1 U8.29 | length 1737.7
  Top Layer w10: U8.29@6174.45,1910.47 6629.53,1910.47 v1(6640,1900) ; v1@6925,2015 v1(6925,2025) 6980,2080 R70.1@7661.54,2080
  Bottom Layer w10: v1(6640,1900) 6720,1900 6795,1825 6895,1825 6925,1855 v1(6925,2025)
SELECT1: R71.1 U8.33 | length 1496.2
  Top Layer w10: U8.33@6174.45,1989.21 6934.21,1989.21 6956.25,2011.25 R71.1@7661.54,2011.25
SELECT2: R72.1 U8.4 | length 1837.8
  Top Layer w10: U8.4@5855.55,1989.21 5919.21,1989.21 v1(5930,2000) ; v1(6815,1952.5) 6825,1942.5 R72.1@7661.54,1942.5
  Bottom Layer w10: v1(5930,2000) 6765,2000 6815,1950 v1(6815,1952.5)
SELECT3: R73.1 U8.5 | length 1847.1
  Top Layer w10: U8.5@5855.55,1969.53 5959.53,1969.53 v1(5960,1970) ; v1(6850,1907.5) 6897.5,1907.5 6931.25,1873.75 R73.1@7661.54,1873.75
  Bottom Layer w10: v1(5960,1970) 6740,1970 6805,1905 v1@6850,1905
SELECT4: R74.1 U8.6 | length 1869.5
  Top Layer w10: U8.6@5855.55,1949.84 5915.16,1949.84 v1(5930,1935) ; v1(6875,1867.5) 6937.5,1805 R74.1@7661.54,1805
  Bottom Layer w10: v1(5930,1935) 6730,1935 6800,1865 6875,1865 v1(6875,1867.5)
STATUS: D48.1 U8.38 | length 177
  Top Layer w10: U8.38@6103.58,2099.45 6103.58,2151.3 6130,2177.72 D48.1@6130,2265.47
SWCLK: P10.1 U8.37 | length 243.9
  Top Layer w10: U8.37@6123.27,2099.45 6123.27,2138.27 6240,2255 P10.1@6240,2295
SWDIO: P10.3 U8.34 | length 499.5
  Top Layer w10: U8.34@6174.45,2008.9 6333.9,2008.9 6440,2115 P10.3@6440,2295 P10.3@6440,2305
SYNC0: R8.1 U1.3 U8.2 | length 1424.8
  Top Layer w10: R8.1@4585,2116.54 4585,2075 4605,2055 5470,2055 5496.42,2028.58 U8.2@5855.55,2028.58
  Top Layer w20: R8.1@4585,2116.54 U1.3@4585,2210
SYNC1: R24.1 U3.3 U8.3 | length 1532.1
  Top Layer w10: R24.1@4921.54,1755 4921.54,1713.46 4935,1700 5130,1700 5150,1680 5150,1620 5200,1570 5440,1570 5475,1605 5475,1910 5573.9,2008.9 U8.3@5855.55,2008.9
  Top Layer w20: U3.3@4820,1755 R24.1@4921.54,1755
USART1_RX: R40.2 U8.31 | length 1969.6
  Top Layer w10: U8.31@6174.45,1949.84 6675.16,1949.84 7490,1135 R40.2@7490,818.46
USART1_TX: U6.4 U8.30 | length 2039.1
  Top Layer w10: U8.30@6174.45,1930.16 6659.84,1930.16 7338.43,1251.57 U6.4@7338.43,657.52
VDDA: C17.2 C18.2 L1.2 U8.9 | length 307
  Top Layer w10: L1.2@5696.26,1715 L1.2@5698.46,1717.2 ; C18.2@5698.46,1845 5735.46,1845 5781.24,1890.79 U8.9@5855.55,1890.79
  Top Layer w20: L1.2@5698.46,1717.2 C17.2@5698.46,1785 C18.2@5698.46,1845
VSS: C5.2 C10.1 C12.1 C13.1 C14.1 C15.1 C16.1 C17.1 C18.1 C20.1 C21.1 C22.1 C23.2 C24.1 C25.1 C26.1 C27.1 C28.1 P10.2 P11.1 R8.2 R13.2 R24.2 R26.2 R36.2 R44.2 R51.2 R58.2 R65.2 R66.2 R70.2 R71.2 R72.2 R73.2 R74.2 R75.2 R79.2 U6.5 U8.8 U8.23 U8.35 U8.47 U13.3 U14.1 U15.2 U16.2 U17.2 U18.2 U19.2 U20.2 U21.2 U22.2 U23.2 U24.2 U25.2 U26.2 U27.2 U28.2 U29.2 U30.2 | length 1617.7
  Top Layer w10: v1@5635,1890 5755,1890 5775.47,1910.47 U8.8@5855.55,1910.47 ; C15.1@5835,2258.46 5846.54,2258.46 5926.42,2178.58 U8.47@5926.42,2099.45 ; U8.23@6103.58,1780.55 6103.58,1731.42 6126.54,1708.46 C13.1@6126.54,1695 ; U8.35@6174.45,2028.58 6228.58,2028.58 6251.54,2051.54 C14.1@6270,2051.54
  Top Layer w20: C17.1@5631.54,1785 C18.1@5631.54,1845 v1(5631.54,1890) C10.1@5631.54,1930 ; U14.1@7545.55,2741.3 7561.3,2741.3 7581.97,2761.97 C28.1@7725,2761.97 ; R74.2@7728.46,1805 R73.2@7728.46,1873.75 R72.2@7728.46,1942.5 R71.2@7728.46,2011.25 R70.2@7728.46,2080
  Top Layer w30: C15.1@5830,2253.46 v1(5830,2300) ; R75.2@5985,2308.46 v1(5985,2345) ; C14.1@6270,2051.54 6306.54,2051.54 6340,2085 P10.2@6340,2295
pads on no net: FD1.3 FD2.3 FD4.3 U15.3 U15.5 U16.3 U16.5 U17.3 U17.5 U18.3 U18.5 U19.3 U19.5 U20.3 U20.5 U21.3 U21.5 U22.3 U22.5 U23.3 U23.5 U24.3 U24.5 U25.3 U25.5 U26.3 U26.5 U27.3 U27.5 U28.3 U28.5 U29.3 U29.5 U30.3 U30.5

## Polygon pours and split planes (outlines as drawn)
VSS on Top Layer "Top Layer-No Net" (hatched 90Degree grid 20 track 8, remove dead copper, pour order 0): 7170,3937.01 7170,2835 7040,2705 7030,2715 5135,2715 5030,2610 5030,2345 4935,2250 10,2250 10,1640 0,1630 10,1620 5025,1620 5025,1395 5170,1250 7040,1250 7145,1145 7145,0 7870,0 7874.02,4.02 7874.02,3935 7172.01,3935
VSS on Bottom Layer "Top Layer-No Net" (hatched 90Degree grid 20 track 8, remove dead copper, pour order 2): 7165,3927.01 7165,2825 7035,2695 7025,2705 5130,2705 5025,2600 5025,2335 4930,2240 5,2240 5,1630 -5,1620 5,1610 5020,1610 5020,1385 5165,1240 7035,1240 7140,1135 7140,-10 7865,-10 7869.02,-5.98 7869.02,3925 7167.01,3925

## Keep-outs
Keep-Out Layer:
  the board outline again, w10

## Other copper
Top Layer:
  rectangle net +3V3: 7440,2480 7475,2725
  rectangle net +3V3: 7325,2225 7750,2685

## Silkscreen, mask and mechanical layers (free items; w line width, h text height)
Top Overlay:
  lines w10: 0,0 7875,0 7875,3937.01 0,3937.01 0,0
  text "IN 0" at 5180,3880 h40
  text "IN 1" at 5665,3880 h40
  text "IN 2" at 6185,3880 h40
  text "IN 3" at 6720,3880 h40
  text "+ DC IN -" at 7255,3880 h40
  text "JUBERA d.o.o." at 300,3800 h60
  text "71000 Sarajevo" at 300,3700 h60
  text "Bosna i Hercegovina" at 300,3600 h60
  text "www.imedia.ba" at 300,3500 h60
  text "D0  D1  D2  D3" at 1495,3470 h52
  text "D4  D5  D6  D7" at 2315,3470 h52
  text "L1  N" at 4070,3470 h52
  text "ICSP" at 6275,2370 h40
  text "SELECT    0" at 7390,2060 h40
  text "SELECT    1" at 7390,1992.5 h40
  text "SELECT    2" at 7390,1925 h40
  text "SELECT    3" at 7390,1857.5 h40
  text "SELECT    4" at 7390,1790 h40
  text "FEB. 2024." at 7215,1105 h60
  text "DE-020224" at 7210,990 h60
  text "D15 D14 D13 D12 D11 D10 D9 D8" at 1495,425 h54
  text "L2  N" at 4070,425 h52
  text "8 CHANEL INPUT AC/DC" at 140,355 h60
  text "16 CHANEL DIMMER" at 140,240 h60
  text "IN 7" at 5155,20 h40
  text "IN 6" at 5660,20 h40
  text "IN 5" at 6195,20 h40
  text "IN 4" at 6720,20 h40
  text "A RS485 B" at 7250,20 h40

## Dimensions
7874.02,3937.01 to 7870,0 on Mechanical 1
0,3937.01 to 7874.02,3935 on Mechanical 1

## Text inside footprints (layer, text, board x,y; h text height)
C23: Top Overlay "+" at 7297.13,2569.53 h30 r180
U13: Top Overlay "1" at 7315.16,2871.97 h30; Top Overlay "2" at 7505.32,2871.97 h30; Top Overlay "3" at 7405.31,2871.97 h30